# EAGLE board ICD breakout (EAGLE 7.2.0)
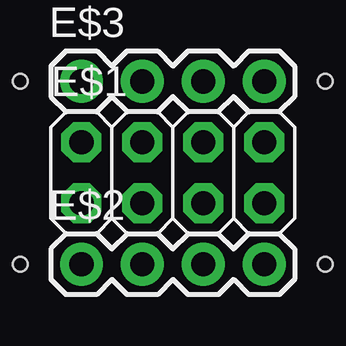
[diagram p0: board, top side]
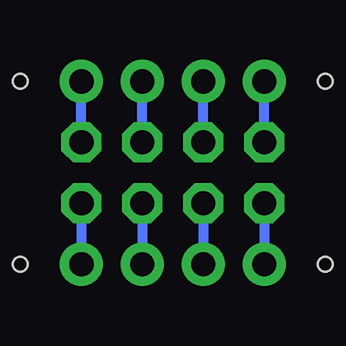
[diagram p1: board, bottom side, seen from below]

No outline drawn. Coordinates in mm, seen from the top.
Copper layers (1*16): Top 0.035mm / dielectric 1.5mm / Bottom 0.035mm
Design rules "default": minimum track width 10mil, minimum drill 24mil, track to track 8mil, track to pad 8mil, pad to pad 8mil, via to via 8mil, smd to smd 8mil, copper to edge 40mil, drill to drill 8mil, minimum pad ring 10mil, minimum via ring 8mil, stop-mask expansion 4mil, vias tented up to drill 0mil, thermal gap 10mil
Holes 0.6 mm at 3.81,12.7 16.51,12.7 16.51,5.08 3.81,5.08

## Footprints (pad centres in the part's own frame; a part is rotated, then mirrored left to right if it is on the bottom)
2X04 = drill 1.016 pad 1.676 octagon: 1 -3.81,-1.27; 2 -3.81,1.27; 3 -1.27,-1.27; 4 -1.27,1.27; 5 1.27,-1.27; 6 1.27,1.27; 7 3.81,-1.27; 8 3.81,1.27
1X04-BIG = drill 1.016 pad 1.778: 1 0,0; 2 2.54,0; 3 5.08,0; 4 7.62,0

## Placement (x,y rotation side)
E$1  [2X04]  10.16,8.89 0 top
E$2  [1X04-BIG]  6.35,5.08 0 top
E$3  [1X04-BIG]  6.35,12.7 0 top

## Library data of the parts
E$1-E$3 = adafruit

## Nets
S$1: E$1.2 E$3.1
S$2: E$1.4 E$3.2
S$3: E$1.6 E$3.3
S$4: E$1.8 E$3.4
S$5: E$1.1 E$2.1
S$6: E$1.3 E$2.2
S$7: E$1.5 E$2.3
S$8: E$1.7 E$2.4

## Tracks (layer width: path | path; a pad name or v marks a point on that pad's centre or on a via)
S$1
  Bottom 0.406: E$1.2 E$3.1
S$2
  Bottom 0.406: E$1.4 E$3.2
S$3
  Bottom 0.406: E$1.6 E$3.3
S$4
  Bottom 0.406: E$1.8 E$3.4
S$5
  Bottom 0.406: E$1.1 E$2.1
S$6
  Bottom 0.406: E$1.3 E$2.2
S$7
  Bottom 0.406: E$1.5 E$2.3
S$8
  Bottom 0.406: E$1.7 E$2.4